# EAGLE board MISSION_FM1 (EAGLE 5.11), part 1 of 2
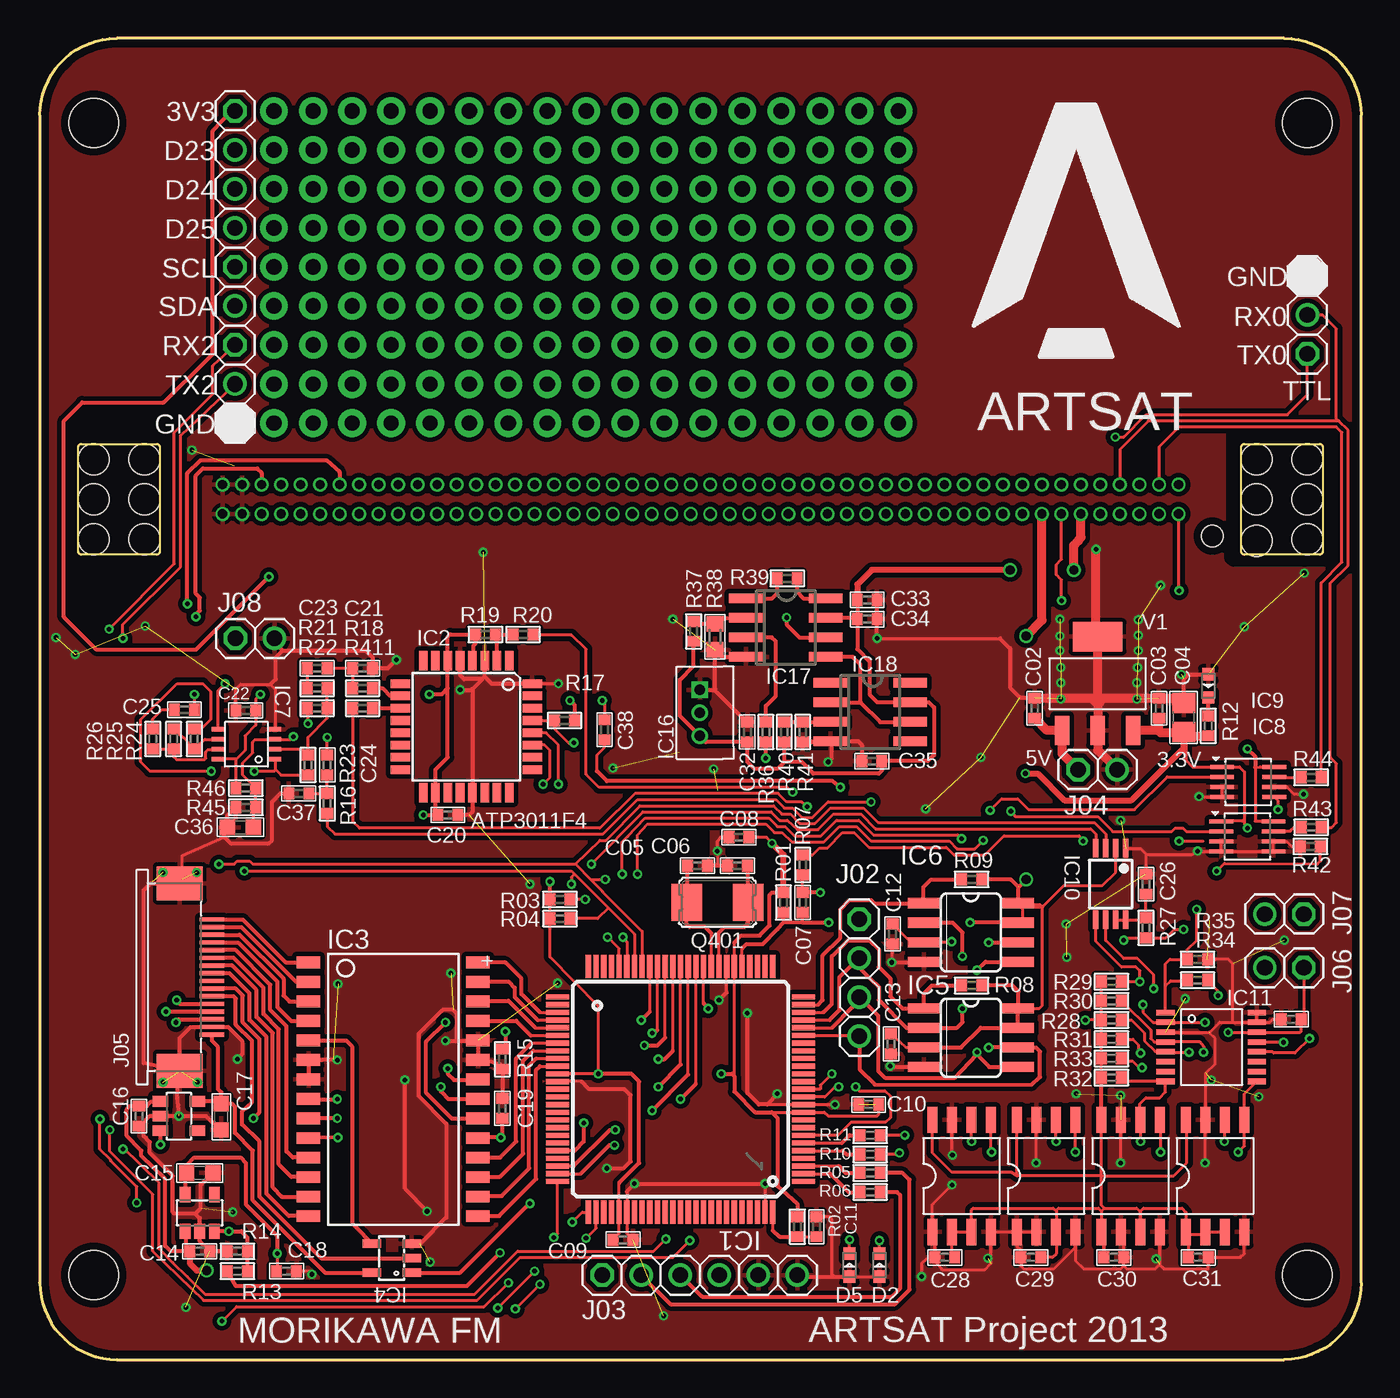
[diagram p0: board, top side]
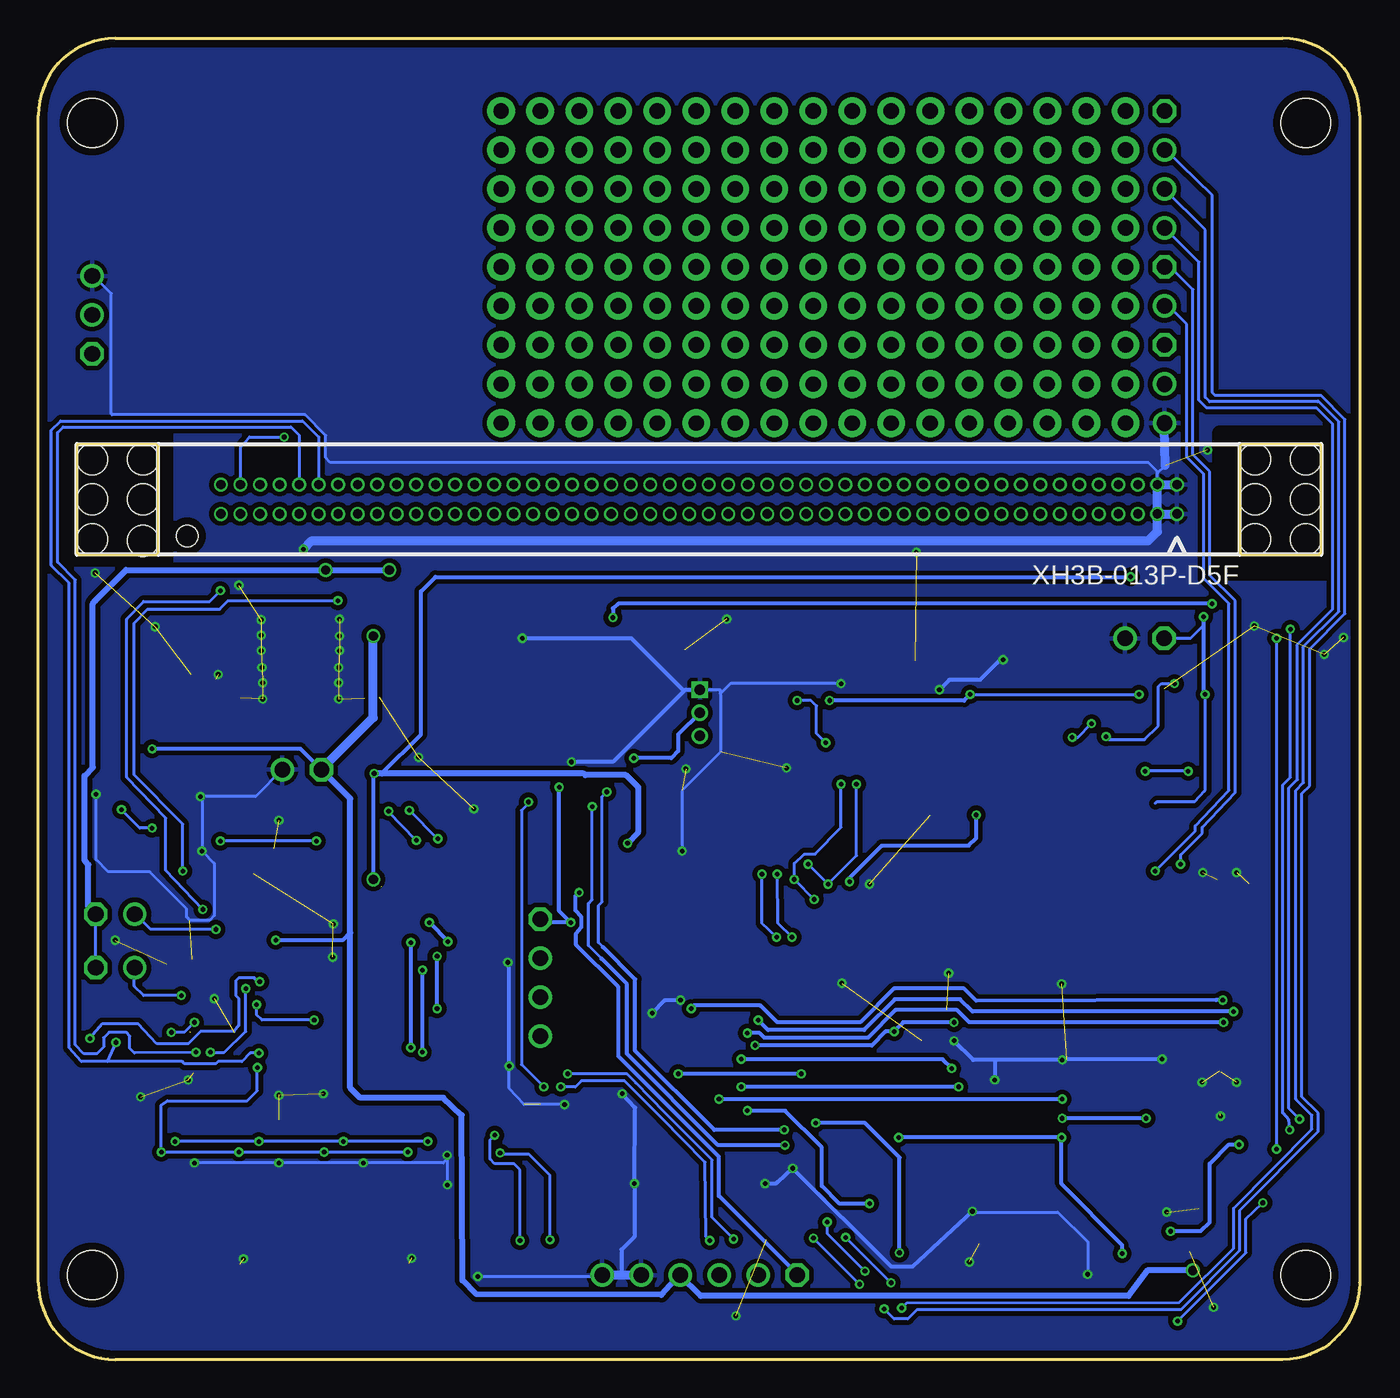
[diagram p1: board, bottom side, seen from below]

Size 86.1 x 86 mm. Coordinates in mm from the lower left corner, seen from the top.
Outline: 0.1,5 0.1,81 arc-90 5.1,86 81.1,86 arc-90 86.1,81 86.1,5 arc-90 81.1,0 5.1,0 arc-90 0.1,5
Outline: 0.1,5 0,5
Copper layers (1*16): Top 0.035mm / dielectric 1.53mm / Bottom 0.035mm
Design rules "pban_5mil-l2": minimum track width 5mil, minimum drill 0.3mm, track to track 5mil, track to pad 0.229mm, pad to pad 5mil, via to via 5mil, smd to smd 5mil, copper to edge 0.5mm, drill to drill 0.5mm, minimum pad ring 0.15mm, minimum via ring 0.15mm, stop-mask expansion 4mil, vias tented up to drill 0.35mm, thermal gap 10mil
Holes 3.2 mm at 3.6,5.5 82.6,5.5 3.6,80.5 82.6,80.5
Holes 2 mm at 6.9,58.6 6.9,53.4 3.6,58.6 3.6,53.4 79.3,58.6 82.6,58.6 82.6,53.4 79.3,53.3 3.6,56 6.9,56 79.3,56 82.6,56
tRestrict: area 45.1,33 to 46.6,33.2; area 46.5,33 to 46.6,33; area 43.3,32.9 to 43.3,34.5; area 43.1,32.9 to 43.3,34.6; 7 lines
bRestrict: area 2.4,51.2 to 9.3,51.2; 10 lines

## Footprints (pad centres in the part's own frame; a part is rotated, then mirrored left to right if it is on the bottom)
C1015(0402) = smd 0.7 x 0.8: 1 -0.65,0; 2 0.65,0
C2012(0805) = smd 1.3 x 1.5: 1 -0.95,0; 2 0.95,0
C1608(0603) = smd 1 x 1: 1 -0.85,0; 2 0.85,0
LED1608 = smd 0.8 x 0.8: A -0.75,0; K 0.75,0
TQFP100 = smd 1.5 x 0.34: 1 -8,6; 2 -8,5.5; 3 -8,5; 4 -8,4.5; 5 -8,4; 6 -8,3.5; 7 -8,3; 8 -8,2.5; 9 -8,2; 10 -8,1.5; 11 -8,1; 12 -8,0.5; 13 -8,0; 14 -8,-0.5; 15 -8,-1; 16 -8,-1.5; 17 -8,-2; 18 -8,-2.5; 19 -8,-3; 20 -8,-3.5; 21 -8,-4; 22 -8,-4.5; 23 -8,-5; 24 -8,-5.5; 25 -8,-6; 51 8,-6; 52 8,-5.5; 53 8,-5; 54 8,-4.5; 55 8,-4; 56 8,-3.5; 57 8,-3; 58 8,-2.5; 59 8,-2; 60 8,-1.5; 61 8,-1; 62 8,-0.5; 63 8,0; 64 8,0.5; 65 8,1; 66 8,1.5; 67 8,2; 68 8,2.5; 69 8,3; 70 8,3.5; 71 8,4; 72 8,4.5; 73 8,5; 74 8,5.5; 75 8,6 | smd 0.34 x 1.5: 26 -6,-8; 27 -5.5,-8; 28 -5,-8; 29 -4.5,-8; 30 -4,-8; 31 -3.5,-8; 32 -3,-8; 33 -2.5,-8; 34 -2,-8; 35 -1.5,-8; 36 -1,-8; 37 -0.5,-8; 38 0,-8; 39 0.5,-8; 40 1,-8; 42 2,-8; 43 2.5,-8; 44 3,-8; 45 3.5,-8; 46 4,-8; 47 4.5,-8; 48 5,-8; 49 5.5,-8; 50 6,-8; 76 6,8; 77 5.5,8; 78 5,8; 79 4.5,8; 80 4,8; 81 3.5,8; 82 3,8; 83 2.5,8; 84 2,8; 85 1.5,8; 86 1,8; 87 0.5,8; 88 0,8; 89 -0.5,8; 90 -1,8; 91 -1.5,8; 92 -2,8; 93 -2.5,8; 95 -3.5,8; 97 -4.5,8; 99 -5.5,8; 100 -6,8 | smd 0.35 x 1.5: 41 1.5,-8 | smd 0.33 x 1.5: 94 -3,8; 96 -4,8; 98 -5,8
TQFP32-08 = smd 1.27 x 0.559: 1 -4.293,2.8; 2 -4.293,2; 3 -4.293,1.2; 4 -4.293,0.4; 5 -4.293,-0.4; 6 -4.293,-1.2; 7 -4.293,-2; 8 -4.293,-2.8; 17 4.293,-2.8; 18 4.293,-2; 19 4.293,-1.2; 20 4.293,-0.4; 21 4.293,0.4; 22 4.293,1.2; 23 4.293,2; 24 4.293,2.8 | smd 0.559 x 1.27: 9 -2.8,-4.293; 10 -2,-4.293; 11 -1.2,-4.293; 12 -0.4,-4.293; 13 0.4,-4.293; 14 1.2,-4.293; 15 2,-4.293; 16 2.8,-4.293; 25 2.8,4.293; 26 2,4.293; 27 1.2,4.293; 28 0.4,4.293; 29 -0.4,4.293; 30 -1.2,4.293; 31 -2,4.293; 32 -2.8,4.293
SOP28 = smd 0.762 x 1.524: 1 -8.255,-5.515; 2 -6.985,-5.515; 3 -5.715,-5.515; 4 -4.445,-5.515; 5 -3.175,-5.515; 6 -1.905,-5.515; 7 -0.635,-5.515; 8 0.635,-5.515; 9 1.905,-5.515; 10 3.175,-5.515; 11 4.445,-5.515; 12 5.715,-5.515; 13 6.985,-5.515; 14 8.255,-5.515; 15 8.255,5.515; 16 6.985,5.515; 17 5.715,5.515; 18 4.445,5.515; 19 3.175,5.515; 20 1.905,5.515; 21 0.635,5.515; 22 -0.635,5.515; 23 -1.905,5.515; 24 -3.175,5.515; 25 -4.445,5.515; 26 -5.715,5.515; 27 -6.985,5.515; 28 -8.255,5.515
SOT23-5@1 = smd 0.55 x 1.2: 1 -0.95,-1.3; 2 0,-1.3; 3 0.95,-1.3; 4 0.95,1.3; 5 -0.95,1.3
SO08 = smd 0.66 x 2.032: 1 -1.905,-3.073; 2 -0.635,-3.073; 3 0.635,-3.073; 4 1.905,-3.073; 5 1.905,3.073; 6 0.635,3.073; 7 -0.635,3.073; 8 -1.905,3.073
TVSP8 = smd 0.3 x 0.8: 1 -0.975,-1.866; 2 -0.325,-1.866; 3 0.325,-1.866; 4 0.975,-1.866; 5 0.975,1.866; 6 0.325,1.866; 7 -0.325,1.866; 8 -0.975,1.866
PSOP8 = smd 0.25 x 1.55: 1 -0.975,-1.7; 2 -0.325,-1.7; 3 0.325,-1.7; 4 0.975,-1.7; 5 0.975,1.7; 6 0.325,1.7; 7 -0.325,1.7; 8 -0.975,1.7
TSSOP8 = smd 1.2 x 0.35: 1 -2.325,0.975; 2 -2.325,0.325; 3 -2.325,-0.325; 4 -2.325,-0.975; 5 2.325,-0.975; 6 2.325,-0.325; 7 2.325,0.325; 8 2.325,0.975
TSSOP16 = smd 0.36 x 1.19: 1 -2.24,-3.03; 2 -1.6,-3.03; 3 -0.96,-3.03; 4 -0.32,-3.03; 5 0.32,-3.03; 6 0.96,-3.03; 7 1.6,-3.03; 8 2.24,-3.03; 9 2.24,2.91; 10 1.6,2.91; 11 0.96,2.91; 12 0.32,2.91; 13 -0.32,2.91; 14 -0.96,2.91; 15 -1.6,2.91; 16 -2.24,2.91
SOIC8 = smd 0.65 x 1.7: 1 -1.9,-3.65; 2 -0.63,-3.65; 3 0.64,-3.65; 4 1.91,-3.65; 5 1.91,3.65; 6 0.64,3.65; 7 -0.63,3.65; 8 -1.9,3.65
LM19_XH = drill 0.7 round: 1 -1.5,0; 2 0,0 | drill 0.7 square: 3 1.5,0
SO8 = smd 0.6 x 2.2: 1 -1.905,-2.6; 2 -0.635,-2.6; 3 0.635,-2.6; 4 1.905,-2.6; 5 1.905,2.6; 6 0.635,2.6; 7 -0.635,2.6; 8 -1.905,2.6
XH3B-013P-D5F = drill 0.6 pad 0.9 round: A1 -31.115,0.953; A2 -29.845,0.953; A3 -28.575,0.953; A4 -27.305,0.953; A5 -26.035,0.953; A6 -24.765,0.953; A7 -23.495,0.953; A8 -22.225,0.953; A9 -20.955,0.953; A10 -19.685,0.953; A11 -18.415,0.953; A12 -17.145,0.953; A13 -15.875,0.953; A14 -14.605,0.953; A15 -13.335,0.953; A16 -12.065,0.953; A17 -10.795,0.953; A18 -9.525,0.953; A19 -8.255,0.953; A20 -6.985,0.953; A21 -5.715,0.953; A22 -4.445,0.953; A23 -3.175,0.953; A24 -1.905,0.953; A25 -0.635,0.953; A26 0.635,0.953; A27 1.905,0.953; A28 3.175,0.953; A29 4.445,0.953; A30 5.715,0.953; A31 6.985,0.953; A32 8.255,0.953; A33 9.525,0.953; A34 10.795,0.953; A35 12.065,0.953; A36 13.335,0.953; A37 14.605,0.953; A38 15.875,0.953; A39 17.145,0.953; A40 18.415,0.953; A41 19.685,0.953; A42 20.955,0.953; A43 22.225,0.953; A44 23.495,0.953; A45 24.765,0.953; A46 26.035,0.953; A47 27.305,0.953; A48 28.575,0.953; A49 29.845,0.953; A50 31.115,0.953; B1 -31.115,-0.953; B2 -29.845,-0.953; B3 -28.575,-0.953; B4 -27.305,-0.953; B5 -26.035,-0.953; B6 -24.765,-0.953; B7 -23.495,-0.953; B8 -22.225,-0.953; B9 -20.955,-0.953; B10 -19.685,-0.953; B11 -18.415,-0.953; B12 -17.145,-0.953; B13 -15.875,-0.953; B14 -14.605,-0.953; B15 -13.335,-0.953; B16 -12.065,-0.953; B17 -10.795,-0.953; B18 -9.525,-0.953; B19 -8.255,-0.953; B20 -6.985,-0.953; B21 -5.715,-0.953; B22 -4.445,-0.953; B23 -3.175,-0.953; B24 -1.905,-0.953; B25 -0.635,-0.953; B26 0.635,-0.953; B27 1.905,-0.953; B28 3.175,-0.953; B29 4.445,-0.953; B30 5.715,-0.953; B31 6.985,-0.953; B32 8.255,-0.953; B33 9.525,-0.953; B34 10.795,-0.953; B35 12.065,-0.953; B36 13.335,-0.953; B37 14.605,-0.953; B38 15.875,-0.953; B39 17.145,-0.953; B40 18.415,-0.953; B41 19.685,-0.953; B42 20.955,-0.953; B43 22.225,-0.953; B44 23.495,-0.953; B45 24.765,-0.953; B46 26.035,-0.953; B47 27.305,-0.953; B48 28.575,-0.953; B49 29.845,-0.953; B50 31.115,-0.953 | hole 1.4: 33.315,2.4
1X04 = drill 1.016 octagon: 1 -3.81,0 | drill 1.016 round: 2 -1.27,0; 3 1.27,0; 4 3.81,0
1X06 = drill 1.016 octagon: 1 -6.35,0 | drill 1.016 round: 2 -3.81,0; 3 -1.27,0; 4 1.27,0; 5 3.81,0; 6 6.35,0
1X02 = drill 1.016 octagon: 1 -1.27,0 | drill 1.016 round: 2 1.27,0
MOREX_527461671 = smd 0.28 x 1.6: 1 -3.75,0; 2 -3.25,0; 3 -2.75,0; 4 -2.25,0; 5 -1.75,0; 6 -1.25,0; 7 -0.75,0; 8 -0.25,0; 9 0.25,0; 10 0.75,0; 11 1.25,0; 12 1.75,0; 13 2.25,0; 14 2.75,0; 15 3.25,0; 16 3.75,0 | smd 2.2 x 3: P1 -6.1,2.1; P2 6.1,2.1
1X03 = drill 1.016 octagon: 1 -2.54,0 | drill 1.016 round: 2 0,0; 3 2.54,0
NX5032GA = smd 2 x 2.4: 1 -2,0; 2 2,0
R1005M(0603) = smd 0.7 x 0.8: 1 -0.65,0; 2 0.65,0
R1608M(0603) = smd 1 x 1.1: 1 -0.85,0; 2 0.85,0
SOT-223 = smd 0.95 x 1.9: 1 -2.3,-3.05; 2 0,-3.05; 3 2.3,-3.05 | smd 3.25 x 1.9: 4 0,3.05
SOT-25 = smd 0.7 x 1: 1 -0.95,-1.2; 2 0,-1.2; 3 0.95,-1.2; 4 0.95,1.2; 5 -0.95,1.2

## Placement (x,y rotation side)
C02  0.1u  [C1015(0402)]  64.85,42.4 90 top
C03  0.1u  [C1015(0402)]  72.95,42.4 90 top
C04  10u  [C2012(0805)]  74.55,41.8 90 top
C05  15p  [C1015(0402)]  42.9,32.15 180 top
C06  15p  [C1015(0402)]  45.5,32.15 0 top
C07  0.1u  [C1015(0402)]  49.75,29.75 270 top
C08  0.1u  [C1015(0402)]  45.6,34 180 top
C09  0.1u  [C1015(0402)]  38.05,7.8 0 top
C10  0.1u  [C1015(0402)]  54.05,16.6 180 top
C11  0.1u  [C1015(0402)]  50.65,8.65 90 top
C12  0.1u  [C1015(0402)]  55.6,27.7 270 top
C13  0.1u  [C1015(0402)]  55.5,20.55 270 top
C14  0.1u  [C1015(0402)]  10.5,7.05 0 top
C15  10uF  [C1608(0603)]  10.5,12.15 0 top
C16  0.1u  [C1015(0402)]  6.55,15.85 270 top
C17  10uF  [C1608(0603)]  11.9,15.8 270 top
C18  0.1u  [C1015(0402)]  16.15,5.75 0 top
C19  0.1u  [C1015(0402)]  30.2,16.35 90 top
C20  0.1u  [C1015(0402)]  26.65,35.45 0 top
C21  4.7u  [C1015(0402)]  21.1,45 0 top
C22  0.1u  [C1015(0402)]  13.5,42.25 180 top
C23  0.1u  [C1015(0402)]  18.15,45 180 top
C24  0.1u  [C1015(0402)]  18.8,38.7 90 top
C25  0.1u  [C1015(0402)]  9.5,42.3 180 top
C26  0.1u  [C1015(0402)]  72.1,30.95 90 top
C27  0.1u  [C1015(0402)]  81.55,22.15 180 top
C28  0.1u  [C1015(0402)]  59,6.65 180 top
C29  0.1u  [C1015(0402)]  64.6,6.65 180 top
C30  0.1u  [C1015(0402)]  70,6.65 0 top
C31  0.1u  [C1015(0402)]  75.5,6.65 0 top
C32  0.1u  [C1015(0402)]  46.15,40.85 90 top
C33  0.1u  [C1015(0402)]  53.95,49.45 0 top
C34  0.1u  [C1015(0402)]  53.95,48.2 0 top
C35  0.1u  [C1015(0402)]  54.25,38.95 180 top
C36  10uF  [C1608(0603)]  13.15,34.65 180 top
C37  4.7u  [C1015(0402)]  16.95,36.85 180 top
C38  0.1u  [C1015(0402)]  36.85,41 90 top
D1  LED1608  [LED1608]  52.8,6.15 90 top
D2  LED1608  [LED1608]  54.75,6.15 90 top
D401  LED1608  [LED1608]  76.15,43.85 270 top
IC1  ATMEGA2560  [TQFP100]  41.8,17.6 180 top
IC2  APT3011F4-AU  [TQFP32-08]  27.85,41.2 270 top
IC3  AL422B  [SOP28]  23.1,17.6 270 top
IC4  SN74LVC1G00DVBR  [SOT23-5@1]  23,6.6 90 top
IC5  FM25V10  [SO08]  60.7,20.95 270 top
IC6  M25P80  [SO08]  60.7,27.8 270 top
IC7  NJM8202  [TVSP8]  13.55,40.05 90 top
IC8  SN74LVC2T45  [PSOP8]  78.7,34.05 270 top
IC9  SN74LVC2T45  [PSOP8]  78.75,37.6 270 top
IC10  PCA9306DP1  [TSSOP8]  69.8,30.95 270 top
IC11  ADG709  [TSSOP16]  76.4,20.35 270 top
IC12  24LC1025-I/SM  [SOIC8]  65.6,11.95 0 top
IC13  24LC1025-I/SM  [SOIC8]  71.1,11.95 0 top
IC14  24LC1025-I/SM  [SOIC8]  76.6,11.95 0 top
IC15  24LC1025-I/SM  [SOIC8]  60.1,11.95 0 top
IC16  LM19_ZH  [LM19_XH]  43.05,42.1 90 top
IC17  AD623R  [SO8]  48.65,47.65 270 top
IC18  AD8541R  [SO8]  54.15,42.15 270 top
J01  XH3B-013P-D5F_NEW  [XH3B-013P-D5F]  43.1,56 180 bottom
J02  [1X04]  53.44,24.86 270 top
J03  [1X06]  43.05,5.5 0 top
J04  [1X02]  68.95,38.4 0 top
J05  FFCMOREX_527461671  [MOREX_527461671]  11.3,24.9 90 top
J06  [1X02]  81.1,25.5 180 top
J07  [1X02]  81.1,29 180 top
J08  [1X02]  14.1,46.95 0 top
J09  [1X03]  82.6,68 90 top
J10  [1X04]  12.8,77.47 270 top
J11  [1X02]  12.8,69.85 270 top
J12  [1X03]  12.8,63.5 270 top
Q401  NX5032GA  [NX5032GA]  44.2,29.75 180 top
R01  10k  [R1005M(0603)]  48.5,29.75 90 top
R02  0  [R1005M(0603)]  49.4,8.65 270 top
R03  4.7k  [R1005M(0603)]  33.95,29.95 180 top
R04  4.7k  [R1005M(0603)]  33.95,28.7 180 top
R05  100  [R1005M(0603)]  54.15,12.15 180 top
R06  100  [R1005M(0603)]  54.15,10.9 180 top
R07  0  [R1005M(0603)]  49.75,32.2 270 top
R08  100k  [R1005M(0603)]  60.75,24.35 0 top
R09  100k  [R1005M(0603)]  60.75,31.25 0 top
R10  10k  [R1005M(0603)]  54.15,13.35 180 top
R11  10k  [R1005M(0603)]  54.15,14.6 180 top
R12  1k  [R1005M(0603)]  76.15,41.25 90 top
R13  1k  [R1005M(0603)]  12.95,5.75 0 top
R14  10k  [R1005M(0603)]  12.95,7.05 0 top
R15  1k  [R1005M(0603)]  30.2,19.55 90 top
R16  4.7k  [R1005M(0603)]  18.8,36.2 90 top
R17  10k  [R1005M(0603)]  34.25,41.6 180 top
R18  4.7k  [R1005M(0603)]  21.1,43.7 180 top
R19  10k  [R1005M(0603)]  29.1,47.2 180 top
R20  1k  [R1005M(0603)]  31.55,47.2 180 top
R21  6.8k  [R1005M(0603)]  18.15,43.7 0 top
R22  20k  [R1005M(0603)]  18.15,42.4 0 top
R23  20k  [R1005M(0603)]  17.55,38.7 270 top
R24  20k  [R1005M(0603)]  10.15,40.4 270 top
R25  200k  [R1005M(0603)]  8.8,40.4 270 top
R26  51  [R1005M(0603)]  7.45,40.4 90 top
R27  200k  [R1005M(0603)]  72.1,28.1 270 top
R28  2k  [R1005M(0603)]  69.85,22.1 180 top
R29  2k  [R1005M(0603)]  69.85,24.6 180 top
R30  2k  [R1005M(0603)]  69.85,23.35 180 top
R31  2k  [R1005M(0603)]  69.85,20.85 180 top
R32  2k  [R1005M(0603)]  69.85,18.35 180 top
R33  2k  [R1005M(0603)]  69.85,19.6 180 top
R34  1k  [R1005M(0603)]  75.45,24.7 0 top
R35  10k  [R1005M(0603)]  75.45,26.05 180 top
R36  820  [R1005M(0603)]  47.35,40.85 90 top
R37  2k  [R1005M(0603)]  42.65,47.4 90 top
R38  1k  [R1608M(0603)]  44.05,47.05 90 top
R39  33k  [R1005M(0603)]  48.75,50.85 180 top
R40  10k  [R1005M(0603)]  48.55,40.85 270 top
R41  10k  [R1005M(0603)]  49.75,40.85 90 top
R42  100  [R1005M(0603)]  82.85,34.65 180 top
R43  100  [R1005M(0603)]  82.8,33.4 0 top
R44  100  [R1005M(0603)]  82.85,37.9 0 top
R45  4.7k  [R1005M(0603)]  13.5,35.95 0 top
R46  4.7k  [R1005M(0603)]  13.5,37.2 180 top
R411  1k  [R1005M(0603)]  21.1,42.4 0 top
U$1  [ARTSAT_LOGO_16MM]  60.1,64 0 top
V1  TC1262-VDB  [SOT-223]  68.95,44 0 top
V2  XC6209F332MR  [SOT-25]  10.5,9.55 0 top
V3  XC6221A282MR  [SOT-25]  9.15,15.85 270 top

## Library data of the parts
C02-C09 C10-C38 = capacitor
D1 D2 D401 IC1-IC6 IC8-IC15 Q401 V1-V3 = IC
IC7 = OPamp
IC16 = LM19_ZH
IC17 = IC; MPN: AD623ARZ.; OC_FARNELL: 9426213; OC_NEWARK: 31M4186
IC18 = IC; MPN: AD8541ARZ; OC_FARNELL: 9603859; OC_NEWARK: 31M4547
J01 = habconector20120702
J02-J04 J06-J09 J10-J12 = PINHEAD_round_254
J05 = FPC
R01-R09 R10-R46 R411 = Resistor
U$1 = LOGO

## Nets
AOUT: C25.1 J01.B3 J08.1
BBBB: J03.2 R05.1
BBBBB: J03.3 R06.1
BUS_SCL: IC11.4 J01.B46 R30.1
BUS_SDA: IC11.13 J01.B45 R31.1
C4022: C06.2 IC1.33 Q401.1
CAM_PWR: IC1.71 R13.1
D0: IC3.1 J05.16
D1: IC3.2 J05.15
D2: IC3.3 J05.14
D3: IC3.4 J05.13
D4: IC3.11 J05.12
D5: IC3.12 J05.11
D6: IC3.13 J05.10
D7: IC3.14 J05.9
D22: IC1.78
D23: IC1.77 J10.2
D24: IC1.76 J10.3
D25: IC1.75 J10.4
DIGI_OUT: C21.1 C23.1 R18.2
DIGI_PLAY: IC1.74 R411.1
DIGI_SLEEP: IC1.73 R20.1
DO0: IC1.53 IC3.28
DO1: IC1.54 IC3.27
DO2: IC1.55 IC3.26
DO3: IC1.56 IC3.25
DO4: IC1.57 IC3.18
DO5: IC1.58 IC3.17
DO6: IC1.59 IC3.16
DO7: IC1.60 IC3.15
F: IC10.6 IC11.5 R28.1
FLASH_CS: IC1.24 IC6.1 R09.1
FRAM_CS: IC1.23 IC5.1 R08.1
GND: C02.2 C03.2 C04.2 C05.1 C06.1 C08.2 C09.2 C10.2 C11.2 C12.2 C13.2 C14.2 C15.2 C16.2 C17.2 C18.2 C19.2 C20.2 C21.2 C22.2 C26.2 C27.2 C28.2 C29.2 C30.2 C31.2 C32.2 C33.2 C34.2 C35.2 C36.2 C37.2 D1.A D2.A D401.A IC1.11 IC1.32 IC1.62 IC1.81 IC1.99 IC2.3 IC2.5 IC2.21 IC2.32 IC3.6 IC3.7 IC3.23 IC3.24 IC4.3 IC5.4 IC6.4 IC7.4 IC8.3 IC8.4 IC8.5 IC8.6 IC9.3 IC9.4 IC9.6 IC10.1 IC11.3 IC11.15 IC11.16 IC12.1 IC12.2 IC12.4 IC12.7 IC13.2 IC13.4 IC13.7 IC14.4 IC14.7 IC15.1 IC15.4 IC15.7 IC16.3 IC17.4 IC18.4 J01.A1 J01.A2 J01.B1 J01.B2 J03.5 J03.6 J04.2 J05.2 J05.P1 J05.P2 J08.2 J09.3 J12.3 R14.1 R15.1 R35.1 R38.1 R41.1 R43.1 R45.1 V1.2 V1.4 V2.2 V3.2
HREF: IC4.2 J05.6
LED2: IC1.5 R10.2
LED3: IC1.6 R11.2
M_INT: R07.1
M_RST: J01.A44 R43.2
MAIN_VDD5: C27.1 C28.1 C29.1 C30.1 C31.1 C32.1 C33.1 C34.1 C35.1 IC11.2 IC11.14 IC12.3 IC12.8 IC13.1 IC13.3 IC13.8 IC14.1 IC14.2 IC14.3 IC14.8 IC15.2 IC15.3 IC15.8 IC16.1 IC17.7 IC18.7 J01.A45 J06.1 J07.1 R28.2 R29.2 R30.2 R31.2 R32.2 R33.2 R37.1 R40.2
MEM0: IC11.8 IC12.6 IC13.6 IC14.6 IC15.6 R32.1
MEM1: IC11.9 IC12.5 IC13.5 IC14.5 IC15.5 R33.1
MISO: IC1.22 IC5.2 IC6.2 J02.2
MISSION_MEM_SW: IC11.1 J01.A50 R34.1 R35.2
MISSION_RST: C07.1 J03.1 R07.2
MOSI: IC1.21 IC5.5 IC6.5 J02.3
N$1: C11.1 IC1.100 R02.2
N$2: J06.2 R34.2
N$3: C05.2 IC1.34 Q401.2
N$4: IC3.5 IC4.4
N$5: R13.2 R14.2 V2.3 V3.3
N$6: IC17.5 IC18.2 IC18.6
N$7: IC2.10 R18.1
N$8: IC2.2 R19.1 R20.2
N$9: IC7.1 R23.2 R24.1
N$10: IC16.2 R36.1
N$11: IC17.8 R39.1
N$12: D401.K R12.2
N$13: C25.2 R26.2
N$14: IC17.1 R39.2
N$15: IC18.3 R40.1 R41.2
N$16: IC17.3 R36.2
N$17: IC2.11 R411.2
N$18: D1.K R10.1
N$19: IC7.6 R24.2 R25.1
N$20: IC7.2 R21.2 R22.2 R23.1
N$21: IC10.5 IC11.12 R29.1
N$22: IC17.2 R37.2 R38.2
N$23: D2.K R11.1
N$24: IC8.7 R42.2
N$25: IC7.7 R25.2 R26.1
N$26: C23.2 R21.1
N$27: C24.2 R22.1
N$28: C38.2 IC2.29 R17.2
N$29: IC9.7 R44.1
N$33: C26.1 IC10.7 IC10.8 R27.1
OE: IC1.39 IC3.22
OP_BIAS: C36.1 IC7.3 IC7.5 R45.2 R46.1
PCLK: IC3.9 J05.7
PWM_OUT: IC1.7 R16.1
PWM_SIG: C24.1 C37.1 R16.2
RCLK: IC1.40 IC3.20 R15.2
RRST: IC1.38 IC3.21
RST: C07.2 C38.1 IC1.30 J02.1 R01.1
RX: J01.B49 J09.1 R44.2
RX0: IC1.2 R06.2
RX1: IC1.45 IC8.2
RX2: IC1.12 J12.1
SCCB_CLK: IC1.41 J05.3
SCCB_DATA: IC1.42 J05.4
SCK: IC1.20 IC5.6 IC6.6 J02.4
SCL_M: IC1.43 IC2.28 IC10.3 J11.1 R03.1
SDA_M: IC1.44 IC2.27 IC10.4 J11.2 R04.1
TEMP_MISSION: IC17.6 J01.B7
TX: J01.B47 J09.2 R42.1
TX0: IC1.3 R05.2
TX1: IC1.46 IC9.2
TX2: IC1.13 J12.2
VDD5: C02.1 C14.1 C16.1 IC8.8 IC9.8 J01.A43 J03.4 J04.1 J07.2 R27.2 V1.1 V2.1 V3.1
VDD28: C17.1 IC4.5 J05.1 V3.5
VDD33: C03.1 C04.1 C08.1 C09.1 C10.1 C12.1 C13.1 C20.1 C22.1 IC1.10 IC1.31 IC1.61 IC1.80 IC2.4 IC2.6 IC2.18 IC5.3 IC5.7 IC5.8 IC6.3 IC6.7 IC6.8 IC7.8 IC8.1 IC9.1 IC9.5 IC10.2 J10.1 R01.2 R02.1 R03.2 R04.2 R08.2 R09.2 R12.1 R17.1 R19.2 R46.2 V1.3
VDD33_2: C15.1 C18.1 C19.1 IC3.10 IC3.19 V2.5
VSYNC: IC1.35 J05.5
WEN: IC1.37 IC4.1
WRST: IC1.36 IC3.8